# Altium PCB PCB1.PcbDoc
Units mil, origin at the board's own origin, x right, y up, seen from the top; angles counter-clockwise.
Board outline 6000 x 4000 mil, 2 copper layers (Top Layer, Bottom Layer); 21 components, 44 nets, 112 pads, 1 vias.
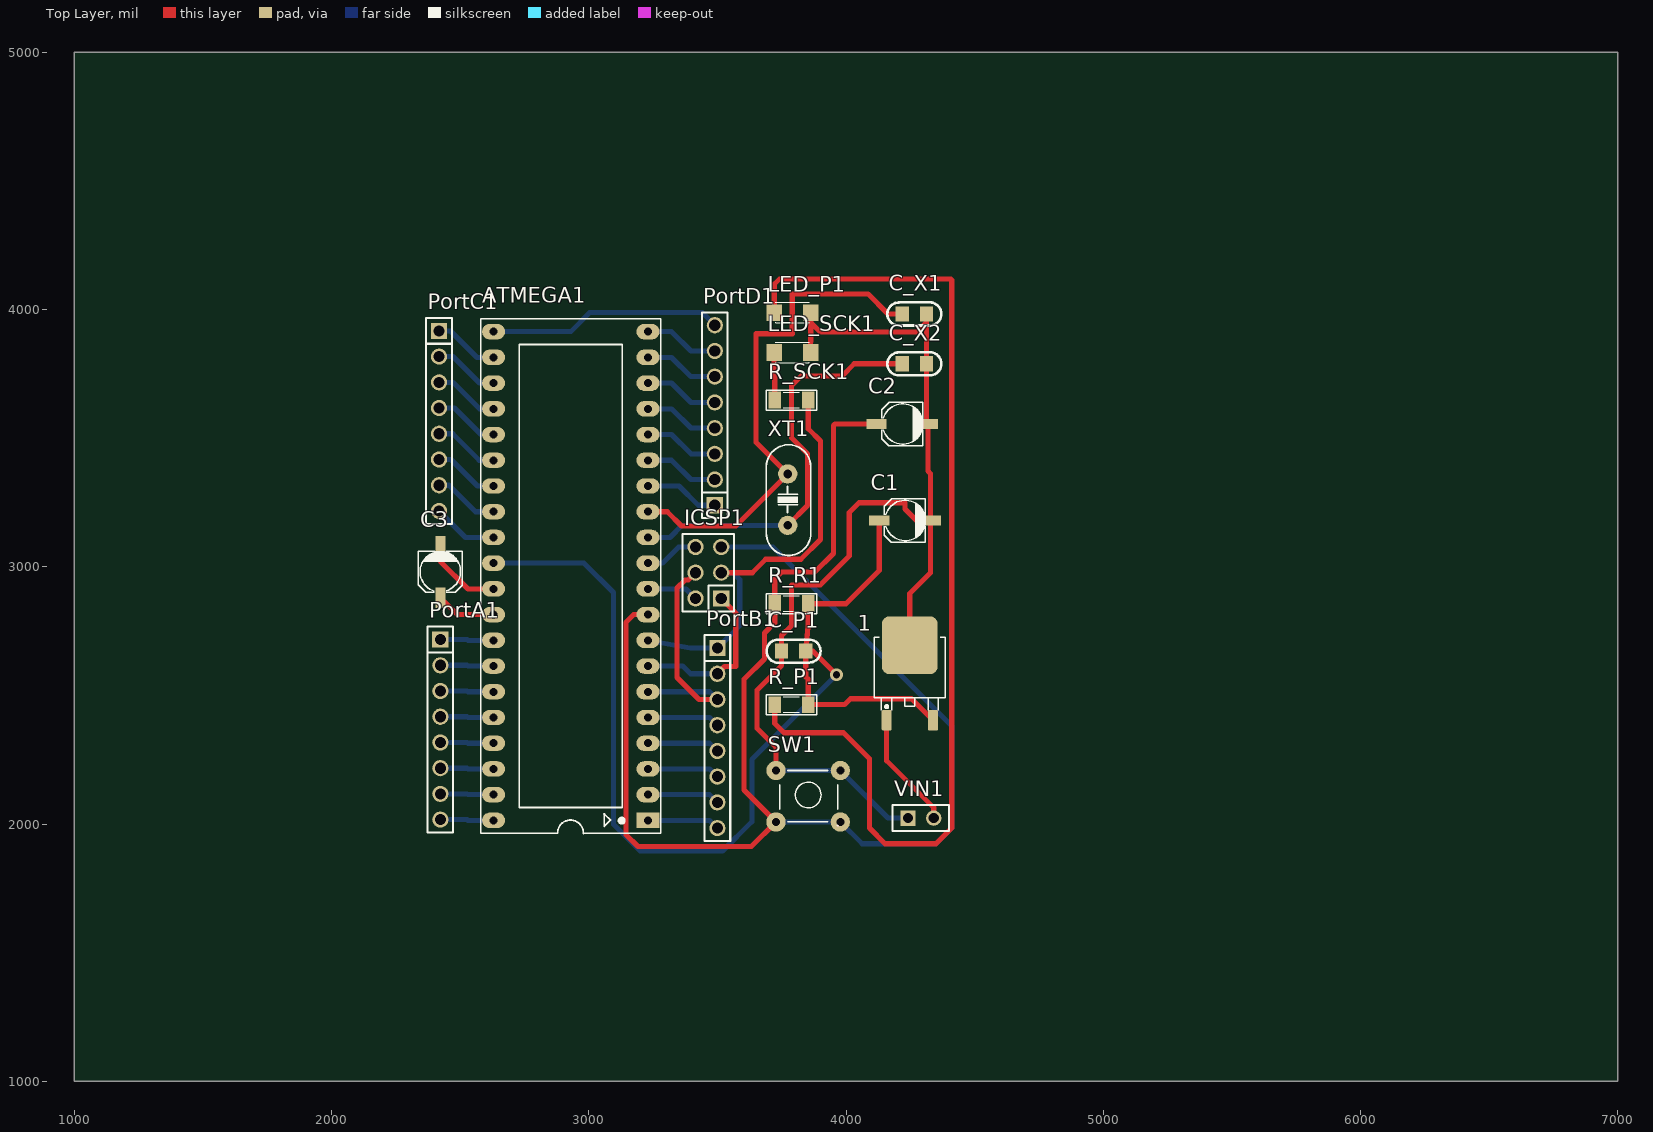
[diagram p0: Top Layer view]
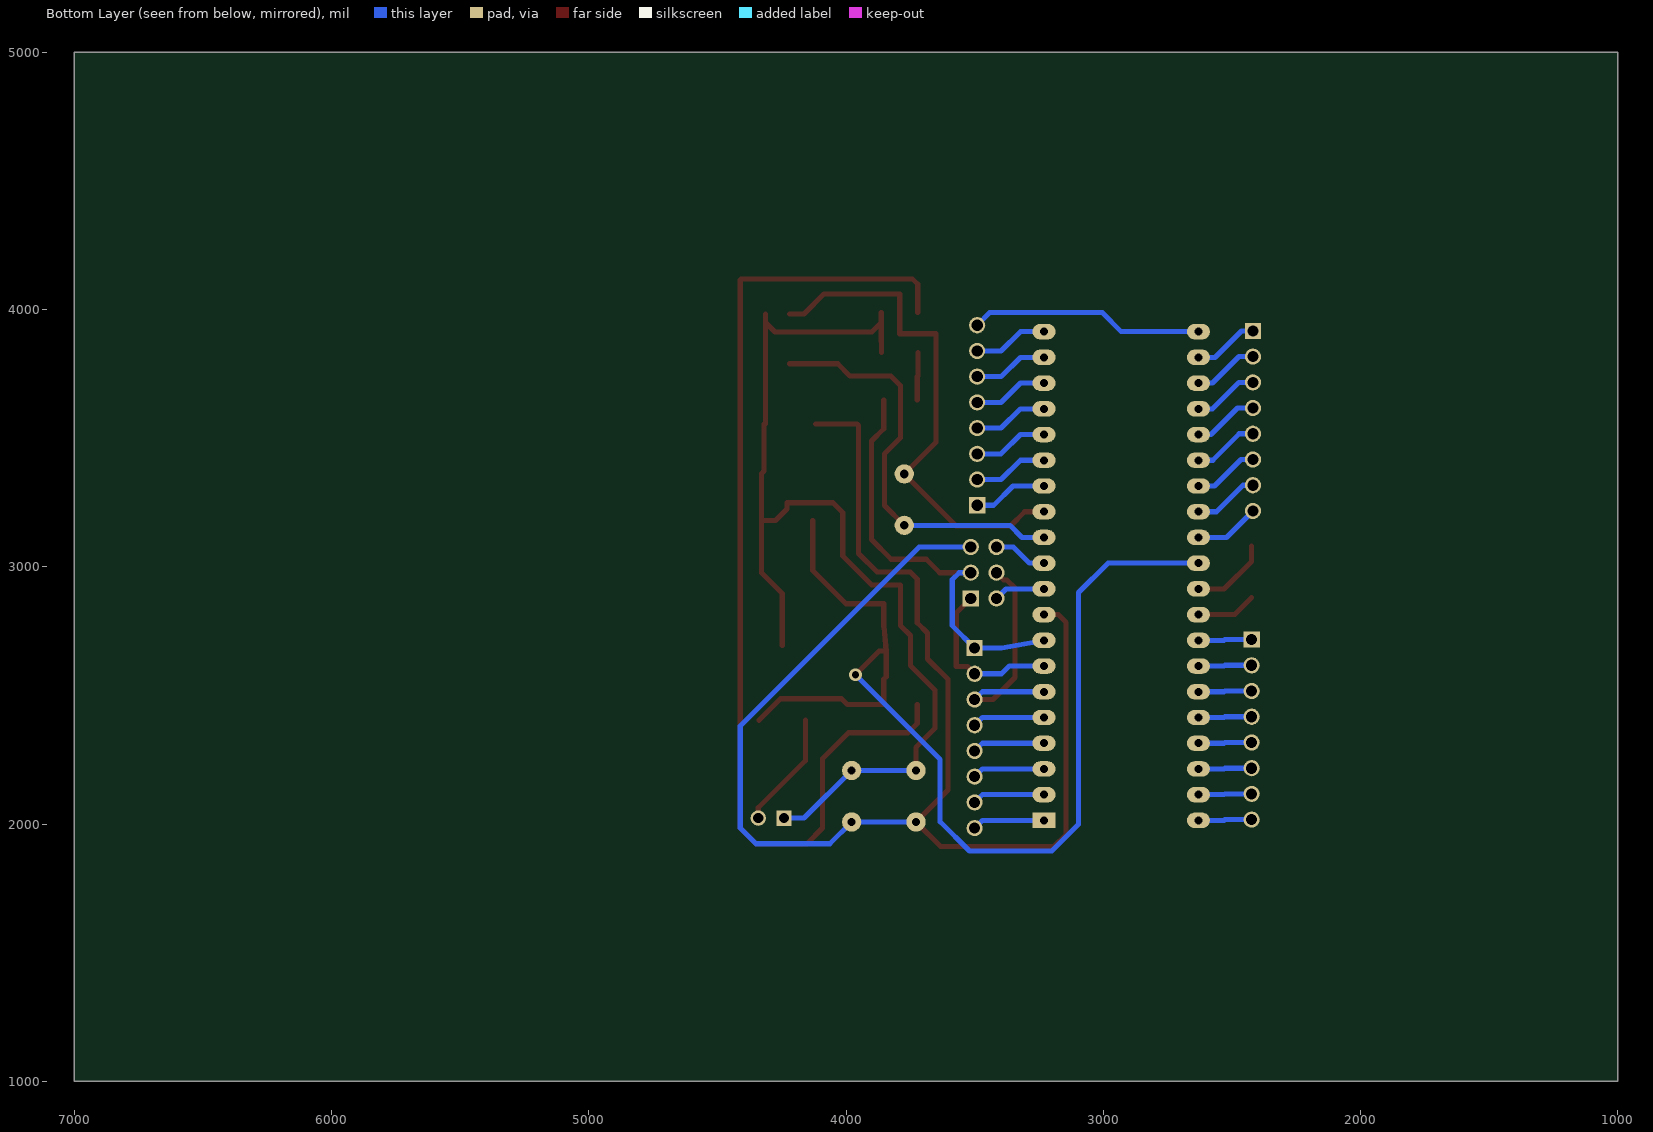
[diagram p1: Bottom Layer view, seen from below]
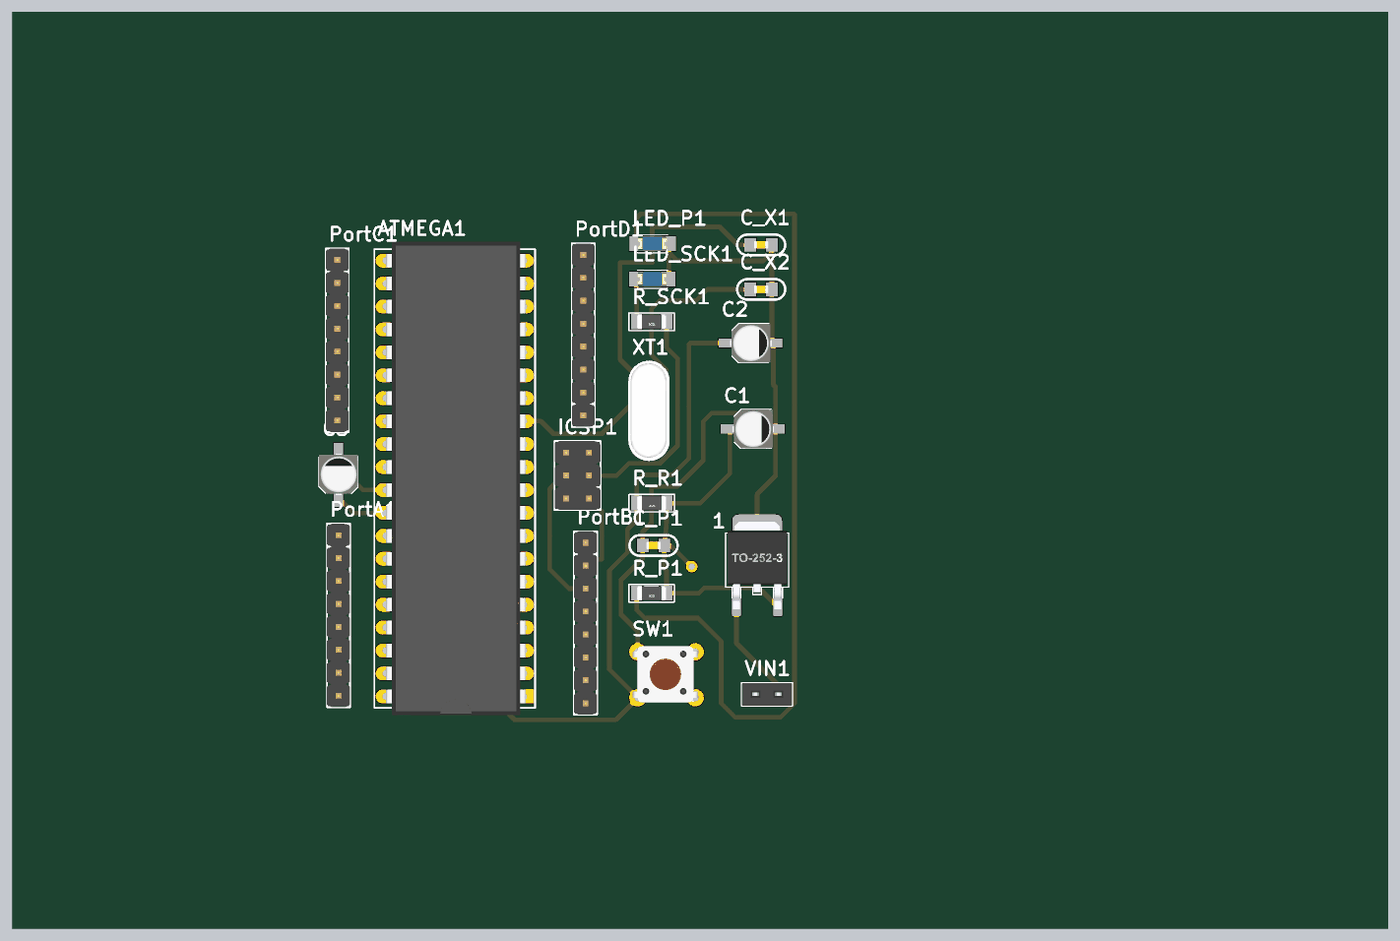
[diagram p2: 3D render of the assembled board from above, using the file's embedded part models]

## Layer stack, top to bottom
Top Solder: solder mask 0.4, Solder Resist, Dk 3.5
Top Layer: signal copper 1.4
Dielectric 1: dielectric 12.6, FR-4, Dk 4.8
Bottom Layer: signal copper 1.4
Bottom Solder: solder mask 0.4, Solder Resist, Dk 3.5

## Board outline
1000,1000 7000,1000 7000,5000 1000,5000

## Design rules (kind name [scope] priority, off if disabled: settings)
Clearance [All] p1: gap=30
PolygonConnect [All] p1: connectstyle=Relief reliefconductorwidth=10 reliefentries=4 polygonreliefangle="90 Angle" airgapwidth=10
RoutingVias [All] p1: holewidth=28 width=50 viastyle="Through Hole" minholewidth=28 minwidth=50 maxholewidth=28 maxwidth=50
SolderMaskExpansion [All] p1: expansion=4
Width [All] p1: maxlimit=30 minlimit=20 preferedwidth=20
30 further rules are at their usual default settings.

## Components (designator, comment, footprint, x,y, rotation, side; value= is the part's Value field where it differs from the comment)
1 "LM78xx" TO252-123 4248,2549 r0 top
ATMEGA1 "ATmega32A-PU" DIP40/W0.6 3230,2014 r90 top
C1 "1uF" Cap_smd_4_3MM_N 4229,3180 r0 top
C2 "1uF" Cap_smd_4_3MM_N 4219,3555 r0 top
C3 "1uF" Cap_smd_4_3MM_N 2423,2980 r90 top
C_P1 "Cap Non-pol" C-NP-0805 3796.5,2672 r0 top
C_X1 "Cap Non-pol" C-NP-0805 4265.5,3983 r180 top
C_X2 "Cap Non-pol" C-NP-0805 4265.5,3789 r180 top
ICSP1 "JP3x2" JP3-D2T 3465,2977 r90 top
LED_P1 "LED" LED-1206-Blue 3721,3988 r0 top
LED_SCK1 "LED" LED-1206-Blue 3720.5,3833 r0 top
PortA1 "JP8" JP8-D1T 2423,2717 r270 top
PortB1 "JP8" JP8-D1T 3500,2684 r270 top
PortC1 "JP8" JP8-D1T 2418,3917 r270 top
PortD1 "JP8" JP8-D1T 3490,3239 r90 top
R_P1 "330" RES-SMD-1206 3788,2464 r180 top
R_R1 "10K" RES-SMD-1206 3788,2857 r180 top
R_SCK1 "330" RES-SMD-1206 3788,3648 r180 top
SW1 "SW" SW2-DIP 3728,2208 r0 top
VIN1 "JP2" JP2-C1T 4241,2023 r0 top
XT1 "16Mhz" XT2 3773.31,3261 r270 top

## Footprints (in the part's own frame and the unit in brackets; to place one, negate y for a bottom-side part, rotate by r counter-clockwise, add the part's x,y. Pads: shape width x height; smd on the part's side, far side on the other; paste and mask are expansions set on the pad)
C-NP-0805 [mm] "Chip Capacitor; Non-polarized; Body 2.0 x 1.3 mm (LxW typ) [2012]"
  rect 1.3x1.5 smd: 1(-1.194,0) 2(1.194,0)
  silkscreen extent -2.67,-1.14 2.66,1.14, body extent -0.8,-0.43 0.8,0.43, height 0.79
Cap_smd_4_3MM_N [mm] "10uF SMD"
  rect 2x1 smd: 1(-2.54,0) 2(2.54,0)
  silkscreen extent -2.03,-2.16 2.04,2.16, body extent -2.25,-2.17 2.35,2.13, height 5.41
DIP40/W0.6 [mil] "40 PIN, W 600mil, Pin to pin 100mil"
  rect 60x90 hole 31: 1(0,0)
  oval 60x90 hole 31: 2(100,0) 3(200,0) 4(300,0) 5(400,0) 6(500,0) 7(600,0) 8(700,0) 9(800,0) 10(900,0) 11(1000,0) 12(1100,0) 13(1200,0) 14(1300,0) 15(1400,0) 16(1500,0) 17(1600,0) 18(1700,0) 19(1800,0) 20(1900,0) 21(1900,600) 22(1800,600) 23(1700,600) 24(1600,600) 25(1500,600) 26(1400,600) 27(1300,600) 28(1200,600) 29(1100,600) 30(1000,600) 31(900,600) 32(800,600) 33(700,600) 34(600,600) 35(500,600) 36(400,600) 37(300,600) 38(200,600) 39(100,600) 40(0,600)
  silkscreen extent -50,-50 1950,650, body extent -82,-10 1982,600, height 224
JP2-C1T [mm] "2 row, straight, gold plating"
  rect 1.52x1.52 hole 1.02: 1(0,0)
  round 1.52 hole 1.02: 2(2.54,0)
  silkscreen extent -1.52,-1.27 4.06,1.27, body extent -1.52,-1.25 4.06,1.25, height 8.51
JP3-D2T [mm] "6 pins, dual pin, straight, gold plating"
  rect 1.6x1.6 hole 1.1: 1(-2.54,-1.27)
  round 1.6 hole 1.1: 2(0,-1.27) 3(2.54,-1.27) 4(2.54,1.27) 5(0,1.27) 6(-2.54,1.27)
  silkscreen extent -3.81,-2.54 3.81,2.54, body extent -3.81,-2.54 3.81,2.54, height 8.55
JP8-D1T [mm] "8 pins, 1 row, straight, gold plating"
  rect 1.6x1.6 hole 1.1: 1(0,0)
  round 1.6 hole 1.1: 2(2.54,0) 3(5.08,0) 4(7.62,0) 5(10.16,0) 6(12.7,0) 7(15.24,0) 8(17.78,0)
  silkscreen extent -1.27,-1.27 19.05,1.27, body extent -1.27,-1.27 19.05,1.27, height 8.54
LED-1206-Blue [mil] "Compoment SMD 120x60mil"
  rect 60x65 smd: 1(0,0) 2(142,0)
  silkscreen extent 6,-40 136,40, body extent 7,-31 133,32, height 43
RES-SMD-1206 [mil]
  rect 50x65 smd: 1(-65,0) 2(65,0)
  silkscreen extent -99,-38 99,39, body extent -63,-31 63,32, height 40
SW2-DIP [mil] "SW button 4pin, 250 x250 mil"
  round 75 hole 31: 1(0,0) 2(0,-200) 3(250,-200) 4(250,0)
  silkscreen extent 15,-215 240,0, body extent -36,-220 276,24, height 276
TO252-123 [mm]
  round 0.5 on Mech15: 0(0,0)
  rrect25% 1x2 smd: 1(-2.285,-3.7) 3(2.285,-3.7)
  rrect25% 5.5x5.7 smd: 2(0,3.7)
  silkscreen extent -3.5,-2.7 3.5,4.5, body extent -3.3,-3.95 3.3,5.76, height 2.31
XT2 [mil] "Footpin for Crystal 2 pin"
  round 75 hole 34: 1(-100,0) 2(100,0)
  silkscreen extent -213,-83 217,90, body extent -216,-87 216,90, height 144

## Part data
1: "Positive Voltage Regulator"
ATMEGA1: "8-Bit AVR Microcontroller with 32K Bytes of In-System Programmable Flash Memory"
C1 C2 C3: library part Cap_Pol, "Polarized Capacitor"
C_P1 C_X1 C_X2: "Non-polarized Capacitor"
ICSP1: "WR-PHD 2.54 mm Dual Socket Header"
LED_P1 LED_SCK1: library part "LED SMD"
PortA1 PortB1 PortC1 PortD1 VIN1: "WR-PHD 2.54 mm Angled Socket Header"
R_P1 R_R1 R_SCK1: library part Res-SMD, "Resistor"
SW1: library part SW4, "Switch button 4 pin"
XT1: library part XT2, "Crystal, 32.768 KHz, -40 to 85 degC, 3.2 x 1.5 x 0.9 mm SMD"

## Via types
v1: diameter 50, hole 28, Top Layer to Bottom Layer, 1 vias

## Nets (pads, with @x,y where several pads share a name; then routed paths per layer and width w, separated by ;. In a path a pad name is that pad's centre, name@x,y a point inside that pad or via, vN(x,y) a via of type N, cw(c..) or ccw(c..) an arc to the next point about the centre after c; other vN are vias at no path point)
GND: 1.2 C1.2 C2.2 C_P1.1 C_X1.1 C_X2.1 LED_P1.2 LED_SCK1.2 SW1.1 SW1.4 VIN1.1 | length 4180.2
  Top Layer w20: SW1.1 3728,2298 3654,2372 3654,2520 3749.5,2615.5 C_P1.1 3749.5,2732.5 3788,2771 3788,2929.5 3900,2929.5 4012.5,3041.99 4012.5,3211.5 4050,3249 4229,3249 4229,3225 4274,3180 C1.2 ; LED_SCK1.2 3863,3910.5 3863,3950 ; LED_P1.2 3863,3950 ; 1.2 4248,2896 4329,2977 C1.2 ; C_X1.1 4312.5,3950 ; 3863,3950 3900,3913 4275.5,3913 4312.5,3950 ; 4312.5,3950 C_X2.1 4312.5,3555 C2.2 4319,3372 4329,3362 C1.2
  Bottom Layer w20: SW1.1 SW1.4 4163,2023 VIN1.1
NetATMEGA1_1: ATMEGA1.1 PortB1.8 | length 282.4
  Bottom Layer w20: ATMEGA1.1 3470,2014 PortB1.8
NetATMEGA1_2: ATMEGA1.2 PortB1.7 | length 282.4
  Bottom Layer w20: ATMEGA1.2 3470,2114 PortB1.7
NetATMEGA1_3: ATMEGA1.3 PortB1.6 | length 282.4
  Bottom Layer w20: ATMEGA1.3 3470,2214 PortB1.6
NetATMEGA1_4: ATMEGA1.4 PortB1.5 | length 282.4
  Bottom Layer w20: ATMEGA1.4 3470,2314 PortB1.5
NetATMEGA1_5: ATMEGA1.5 PortB1.4 | length 282.4
  Bottom Layer w20: ATMEGA1.5 3470,2414 PortB1.4
NetATMEGA1_6: ATMEGA1.6 ICSP1.5 PortB1.3 | length 919.5
  Top Layer w20: ICSP1.5 3387,2949 3375,2949 3343,2917 3343,2569 3428,2484 PortB1.3
  Bottom Layer w20: ATMEGA1.6 3470,2514 PortB1.3
NetATMEGA1_7: ATMEGA1.7 ICSP1.1 PortB1.2 | length 653.9
  Top Layer w20: PortB1.2 3528,2612 3571.5,2612 3571.5,2820.5 ICSP1.1
  Bottom Layer w20: ATMEGA1.7 3365,2614 3395,2584 PortB1.2
NetATMEGA1_8: ATMEGA1.8 ICSP1.2 PortB1.1 R_SCK1.1 | length 1659.1
  Top Layer w20: ICSP1.2 3635.5,2977 3688,3029.5 3824.5,3029.5 3900.81,3105.81 3900.81,3488.5 3853,3536.31 R_SCK1.1
  Bottom Layer w20: ATMEGA1.8 3395,2684 PortB1.1 3587,2771 3587,2950 3560,2977 ICSP1.2
NetATMEGA1_9: ATMEGA1.9 C2.1 ICSP1.3 R_R1.2 SW1.2 SW1.3 | length 5871.9
  Top Layer w20: ATMEGA1.9 3175,2814 3145,2784 3145,1958 3191,1912 3632,1912 SW1.2 3604,2132 3604,2562.5 3683,2641.5 3683,2742 3723,2782 R_R1.2 3723,2952.5 3750,2979.5 3878.5,2979.5 3951,3052 3951,3549 3957,3555 C2.1
  Bottom Layer w20: ICSP1.3 3715,3077 4411,2381 4411,1984 4350,1923 4063,1923 SW1.3 SW1.2
NetATMEGA1_10: ATMEGA1.10 ICSP1.6 | length 200.3
  Bottom Layer w20: ATMEGA1.10 3378,2914 ICSP1.6
NetATMEGA1_11: ATMEGA1.11 ICSP1.4 | length 211.1
  Bottom Layer w20: ATMEGA1.11 3287,3014 3350,3077 ICSP1.4
NetATMEGA1_12: ATMEGA1.12 C_X2.2 XT1.2 | length 1629.6
  Top Layer w20: XT1.2 3850.81,3238.5 3850.81,3439 3788,3501.81 3788,3704 3825,3741 3984,3741 4032,3789 C_X2.2
  Bottom Layer w20: ATMEGA1.12 3316,3114 3363,3161 XT1.2
NetATMEGA1_13: ATMEGA1.13 C_X1.2 XT1.1 | length 2001.6
  Top Layer w20: ATMEGA1.13 3305,3214 3360,3159 3571.31,3159 XT1.1 3650,3484.31 3650,3906 3791,3906 3791,4061 4085,4061 4163,3983 C_X1.2
NetATMEGA1_14: ATMEGA1.14 PortD1.1 | length 291.1
  Bottom Layer w20: ATMEGA1.14 3351,3314 3426,3239 PortD1.1
NetATMEGA1_15: ATMEGA1.15 PortD1.2 | length 291.1
  Bottom Layer w20: ATMEGA1.15 3322,3414 3397,3339 PortD1.2
NetATMEGA1_16: ATMEGA1.16 PortD1.3 | length 291.1
  Bottom Layer w20: ATMEGA1.16 3322,3514 3397,3439 PortD1.3
NetATMEGA1_17: ATMEGA1.17 PortD1.4 | length 291.1
  Bottom Layer w20: ATMEGA1.17 3322,3614 3397,3539 PortD1.4
NetATMEGA1_18: ATMEGA1.18 PortD1.5 | length 291.1
  Bottom Layer w20: ATMEGA1.18 3322,3714 3397,3639 PortD1.5
NetATMEGA1_19: ATMEGA1.19 PortD1.6 | length 291.1
  Bottom Layer w20: ATMEGA1.19 3322,3814 3397,3739 PortD1.6
NetATMEGA1_20: ATMEGA1.20 PortD1.7 | length 291.1
  Bottom Layer w20: ATMEGA1.20 3322,3914 3397,3839 PortD1.7
NetATMEGA1_21: ATMEGA1.21 PortD1.8 | length 910.9
  Bottom Layer w20: ATMEGA1.21 2930,3914 3004,3988 3441,3988 PortD1.8
NetATMEGA1_22: ATMEGA1.22 PortC1.1 | length 254.7
  Bottom Layer w20: PortC1.1 2463,3917 2566,3814 ATMEGA1.22
NetATMEGA1_23: ATMEGA1.23 PortC1.2 | length 254.7
  Bottom Layer w20: PortC1.2 2472,3817 2575,3714 ATMEGA1.23
NetATMEGA1_24: ATMEGA1.24 PortC1.3 | length 254.7
  Bottom Layer w20: PortC1.3 2472,3717 2575,3614 ATMEGA1.24
NetATMEGA1_25: ATMEGA1.25 PortC1.4 | length 254.7
  Bottom Layer w20: PortC1.4 2478,3617 2581,3514 ATMEGA1.25
NetATMEGA1_26: ATMEGA1.26 PortC1.5 | length 254.7
  Bottom Layer w20: PortC1.5 2471,3517 2574,3414 ATMEGA1.26
NetATMEGA1_27: ATMEGA1.27 PortC1.6 | length 254.7
  Bottom Layer w20: PortC1.6 2464,3417 2567,3314 ATMEGA1.27
NetATMEGA1_28: ATMEGA1.28 PortC1.7 | length 254.7
  Bottom Layer w20: PortC1.7 2457,3317 2560,3214 ATMEGA1.28
NetATMEGA1_29: ATMEGA1.29 PortC1.8 | length 254.7
  Bottom Layer w20: PortC1.8 2521,3114 ATMEGA1.29
NetATMEGA1_31: ATMEGA1.31 C3.2 | length 310.3
  Top Layer w20: C3.2 2423,3021 2530,2914 ATMEGA1.31
NetATMEGA1_32: ATMEGA1.32 C3.1 | length 234.3
  Top Layer w20: C3.1 2489,2814 ATMEGA1.32
NetATMEGA1_33: ATMEGA1.33 PortA1.1 | length 208.2
  Bottom Layer w20: PortA1.1 2527,2717 2530,2714 ATMEGA1.33
NetATMEGA1_34: ATMEGA1.34 PortA1.2 | length 208.2
  Bottom Layer w20: PortA1.2 2527,2617 2530,2614 ATMEGA1.34
NetATMEGA1_35: ATMEGA1.35 PortA1.3 | length 208.2
  Bottom Layer w20: PortA1.3 2527,2517 2530,2514 ATMEGA1.35
NetATMEGA1_36: ATMEGA1.36 PortA1.4 | length 208.2
  Bottom Layer w20: PortA1.4 2527,2417 2530,2414 ATMEGA1.36
NetATMEGA1_37: ATMEGA1.37 PortA1.5 | length 208.2
  Bottom Layer w20: PortA1.5 2527,2317 2530,2314 ATMEGA1.37
NetATMEGA1_38: ATMEGA1.38 PortA1.6 | length 208.2
  Bottom Layer w20: PortA1.6 2527,2217 2530,2214 ATMEGA1.38
NetATMEGA1_39: ATMEGA1.39 PortA1.7 | length 208.2
  Bottom Layer w20: PortA1.7 2527,2117 2530,2114 ATMEGA1.39
NetATMEGA1_40: ATMEGA1.40 PortA1.8 | length 208.2
  Bottom Layer w20: PortA1.8 2527,2017 2530,2014 ATMEGA1.40
NetLED_P1_1: LED_P1.1 R_P1.2 | length 4078.3
  Top Layer w20: LED_P1.1 3721,4098.08 3740.92,4118 4407,4118 4411,4114 4411,1984 4350,1923 4152,1923 4091,1984 4091,2254 3990,2355 3759,2355 3723,2391 R_P1.2
NetLED_SCK1_1: LED_SCK1.1 R_SCK1.2 | length 186
  Top Layer w20: LED_SCK1.1 3720.5,3741.5 3723,3739 R_SCK1.2
VCC: 1.3 ATMEGA1.30 C1.1 C_P1.2 R_P1.1 R_R1.1 | length 4358.4
  Top Layer w20: R_R1.1 R_R1.1@3853,2856 ; v1(3963,2580) 3871,2672 C_P1.2 ; C1.1 4129,2985 4000,2856 R_R1.1@3853,2856 ; 1.3 4254.29,2487 4017,2487 3994,2464 R_P1.1 3853,2563 3843.5,2572.5 C_P1.2 ; C_P1.2 3853,2768.5 R_R1.1@3853,2856
  Bottom Layer w20: ATMEGA1.30 2982,3014 3096,2900 3096,1999 3200,1895 3520,1895 3634,2009 3634,2251 v1(3963,2580)
VIN: 1.1 VIN1.2 | length 456.1
  Top Layer w20: 1.1 4158.04,2245.96 4341,2063 VIN1.2
pads on no net: 1.0